# EAGLE board PCB (EAGLE 6.5.0)
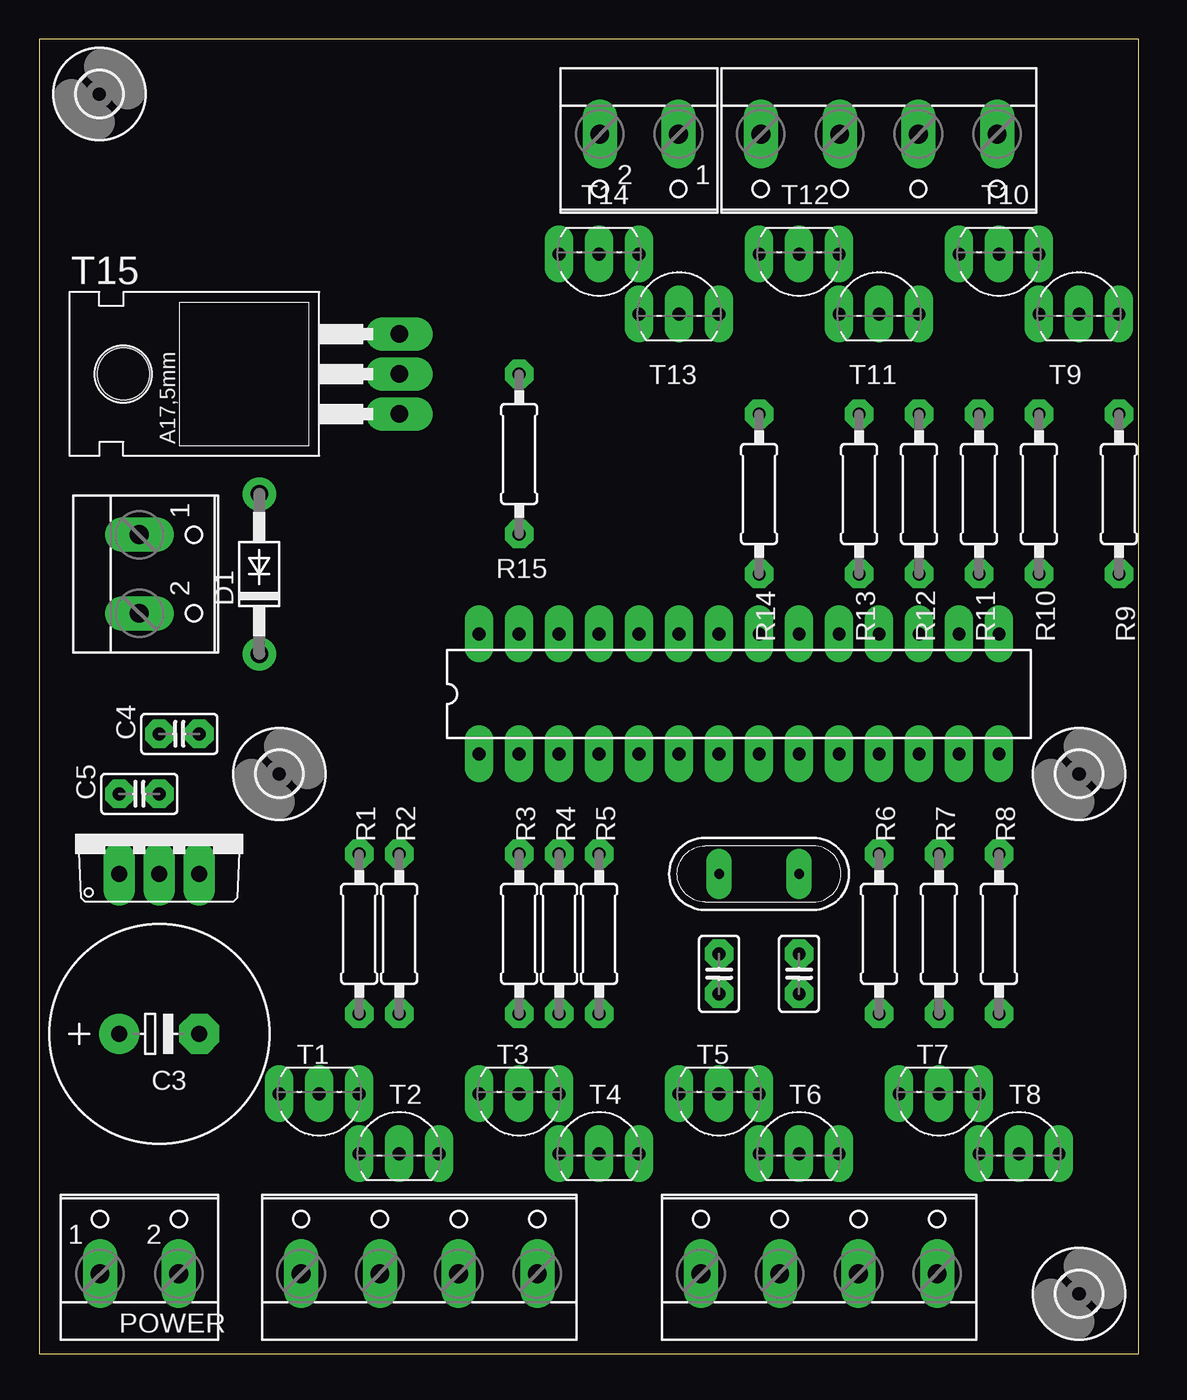
[diagram p0: board, top side]
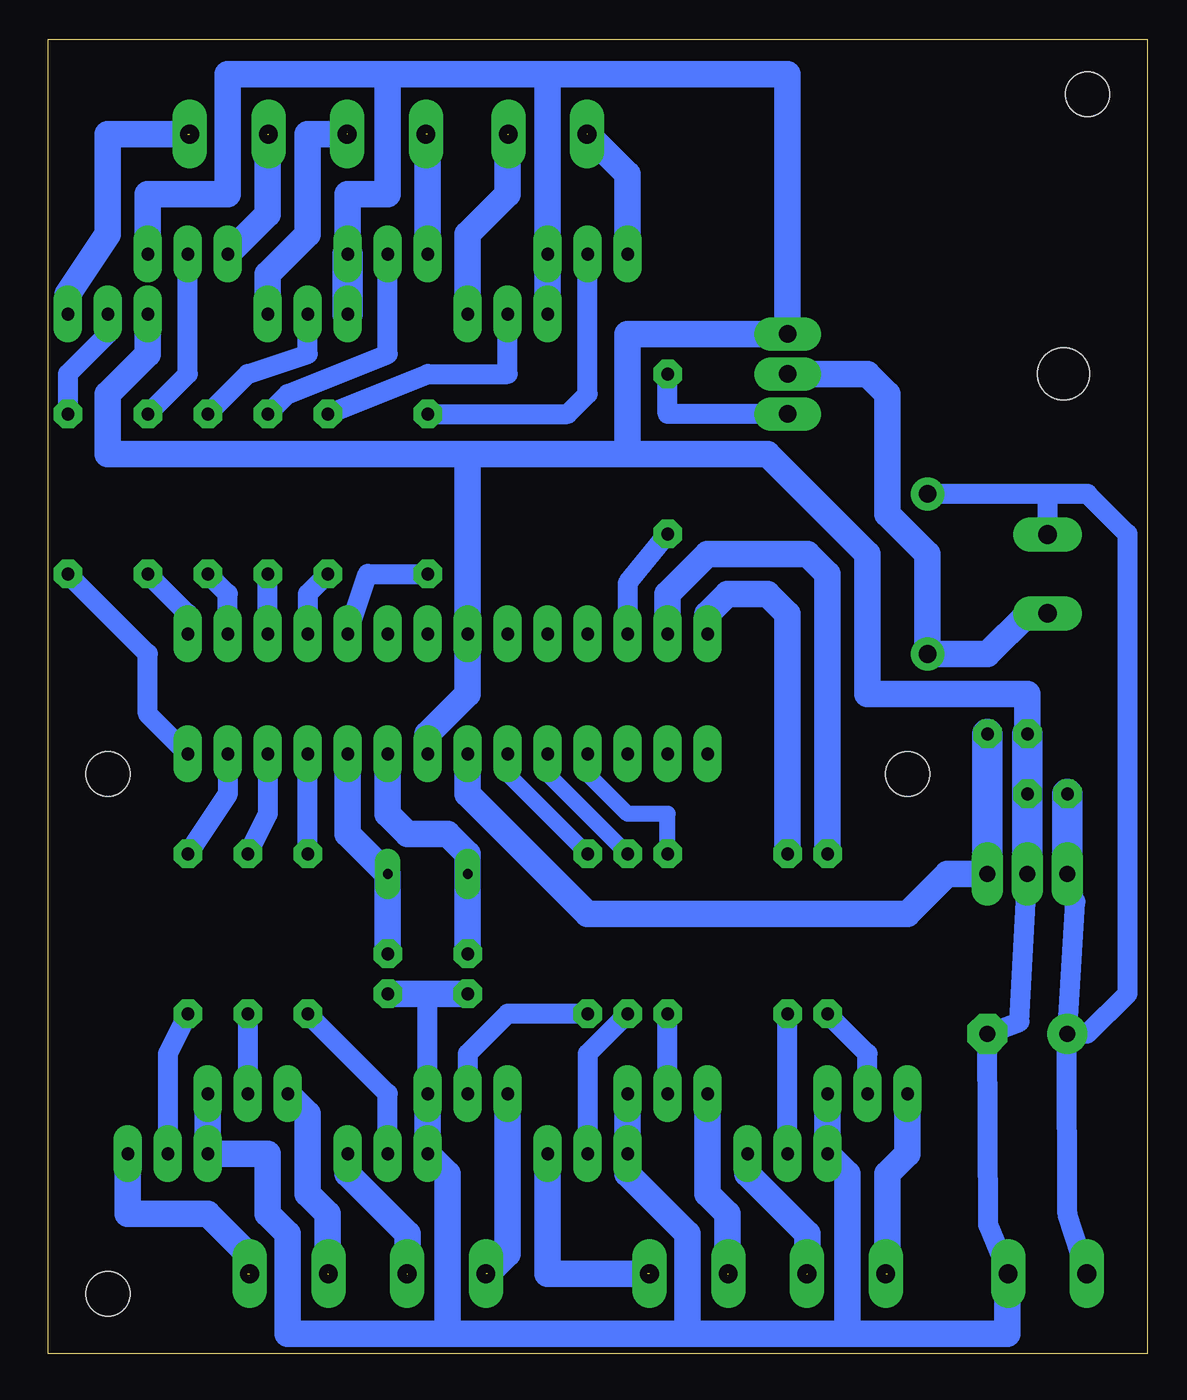
[diagram p1: board, bottom side, seen from below]

Size 69.84 x 83.49 mm. Coordinates in mm from the lower left corner, seen from the top.
Outline: 0,0 69.84,0 69.84,83.49 0,83.49 0,0
Copper layers (1*16): Top 0.8mm / dielectric 1.3mm / Bottom 0.8mm
Design rules "default": minimum track width 0.8mm, minimum drill 24mil, track to track 0.2mm, track to pad 0.2mm, pad to pad 0.2mm, via to via 0.2mm, smd to smd 0.2mm, copper to edge 0.3mm, drill to drill 0.3mm, minimum pad ring 0.5mm, minimum via ring 1mm, stop-mask expansion 4mil, vias tented up to drill 0mil, thermal gap 10mil

## Footprints (pad centres in the part's own frame; a part is rotated, then mirrored left to right if it is on the bottom)
C2.5-2 = drill 0.813 pad 1.6 octagon: 1 -1.27,0; 2 1.27,0
E5-13 = drill 1.016 pad 2.54: + -2.54,0 | drill 1.016 pad 2.54 octagon: - 2.54,0
DO41-10 = drill 1.118: A 5.08,0; C -5.08,0
2,8 = hole 2.8: 0,0
DIL28-3 = drill 0.813 long: 1 -16.51,-3.81; 2 -13.97,-3.81; 3 -11.43,-3.81; 4 -8.89,-3.81; 5 -6.35,-3.81; 6 -3.81,-3.81; 7 -1.27,-3.81; 8 1.27,-3.81; 9 3.81,-3.81; 10 6.35,-3.81; 11 8.89,-3.81; 12 11.43,-3.81; 13 13.97,-3.81; 14 16.51,-3.81; 15 16.51,3.81; 16 13.97,3.81; 17 11.43,3.81; 18 8.89,3.81; 19 6.35,3.81; 20 3.81,3.81; 21 1.27,3.81; 22 -1.27,3.81; 23 -3.81,3.81; 24 -6.35,3.81; 25 -8.89,3.81; 26 -11.43,3.81; 27 -13.97,3.81; 28 -16.51,3.81
TO220V = drill 1.016 long: 1 -2.54,-2.54; 2 0,-2.54; 3 2.54,-2.54
W237-102 = drill 1.194 long: 1 -2.5,-1.27; 2 2.5,-1.27
QS = drill 0.61 long: 1 -2.54,0; 2 2.54,0
0207/10 = drill 0.813 octagon: 1 -5.08,0; 2 5.08,0
TO92-EBC = drill 0.813 long: B 0,-1.27; C 2.54,-1.27; E -2.54,-1.27
TO220 = drill 1.118 long: 1 -2.54,-6.35; 2 0,-6.35; 3 2.54,-6.35 | hole 3.302: 0,11.176
W237-4 = drill 1.194 long: 1 -7.5,-1.27; 2 -2.5,-1.27; 3 2.5,-1.27; 4 7.5,-1.27

## Placement (x,y rotation side)
C1  22 nF  [C2.5-2]  43.18,24.13 270 top
C2  22 nF  [C2.5-2]  48.26,24.13 270 top
C3  [E5-13]  7.62,20.32 0 top
C4  [C2.5-2]  8.89,39.37 180 top
C5  [C2.5-2]  6.35,35.56 0 top
D1  1N4004  [DO41-10]  13.97,49.53 90 top
H1  MOUNT-HOLE2.8  [2,8]  3.81,80.01 0 top
H2  MOUNT-HOLE2.8  [2,8]  66.04,36.83 0 top
H3  MOUNT-HOLE2.8  [2,8]  66.04,3.81 0 top
H4  MOUNT-HOLE2.8  [2,8]  15.24,36.83 0 top
IC1  MEGA8-P  [DIL28-3]  44.45,41.91 0 top
IC2  7805TV  [TO220V]  7.62,33.02 0 top
POWER  12V  [W237-102]  6.35,6.35 0 top
Q1  16 MHz  [QS]  45.72,30.48 180 top
R1  1K  [0207/10]  20.32,26.67 90 top
R2  1K  [0207/10]  22.86,26.67 90 top
R3  1K  [0207/10]  30.48,26.67 90 top
R4  1K  [0207/10]  33.02,26.67 90 top
R5  1K  [0207/10]  35.56,26.67 90 top
R6  1K  [0207/10]  53.34,26.67 90 top
R7  1K  [0207/10]  57.15,26.67 90 top
R8  1K  [0207/10]  60.96,26.67 90 top
R9  1K  [0207/10]  68.58,54.61 270 top
R10  1K  [0207/10]  63.5,54.61 270 top
R11  1K  [0207/10]  59.69,54.61 270 top
R12  1K  [0207/10]  55.88,54.61 270 top
R13  1K  [0207/10]  52.07,54.61 270 top
R14  1K  [0207/10]  45.72,54.61 270 top
R15  1K  [0207/10]  30.48,57.15 270 top
T1  [TO92-EBC]  17.78,15.24 180 top
T2  [TO92-EBC]  22.86,13.97 0 top
T3  2N2222  [TO92-EBC]  30.48,15.24 180 top
T4  2N2222  [TO92-EBC]  35.56,13.97 0 top
T5  2N2222  [TO92-EBC]  43.18,15.24 180 top
T6  2N2222  [TO92-EBC]  48.26,13.97 0 top
T7  2N2222  [TO92-EBC]  57.15,15.24 180 top
T8  2N2222  [TO92-EBC]  62.23,13.97 0 top
T9  2N2222  [TO92-EBC]  66.04,67.31 0 top
T10  2N2222  [TO92-EBC]  60.96,68.58 180 top
T11  2N2222  [TO92-EBC]  53.34,67.31 0 top
T12  2N2222  [TO92-EBC]  48.26,68.58 180 top
T13  2N2222  [TO92-EBC]  40.64,67.31 0 top
T14  [TO92-EBC]  35.56,68.58 180 top
T15  TIP122  [TO220]  16.51,62.23 90 top
X1  LED's  [W237-4]  24.13,6.35 0 top
X2  LED's  [W237-4]  49.53,6.35 0 top
X3  LED's  [W237-4]  53.34,76.2 180 top
X4  LED's  [W237-102]  38.1,76.2 180 top
X5  STREETLIGHT & 12V+  [W237-102]  7.62,49.53 270 top

## Library data of the parts
C1 C2 C4 C5 = capacitor-wima
C3 = resistor
D1 = diode
H1-H4 = holes
IC1 = atmel; OC_FARNELL: unknown; OC_NEWARK: unknown
IC2 = linear
POWER X4 X5 = con-wago-500; MPN: 237-102; OC_FARNELL: unknown; OC_NEWARK: 70K9898
Q1 = special
R1-R15 = eagle-ltspice; SPICEMODEL: NONE; SPICEPREFIX: R
T1-T14 = transistor-neu-to92
T15 = transistor
X1-X3 = con-wago-500; OC_FARNELL: unknown; OC_NEWARK: unknown

## Nets
+5V: C4.1 IC1.7 IC2.3
+12V: C3.+ C5.1 D1.A IC2.1 POWER.1 X5.1
AVCC: IC1.20
GND: C1.2 C2.2 C3.- C4.2 C5.2 IC1.8 IC1.22 IC2.2 POWER.2 T1.E T2.E T3.E T4.E T5.E T6.E T7.E T8.E T9.E T10.E T11.E T12.E T13.E T14.E T15.3
N$1: R9.1 T9.B
N$2: R10.1 T10.B
N$3: R11.1 T11.B
N$4: R12.1 T12.B
N$5: R13.1 T13.B
N$6: R14.1 T14.B
N$7: R6.1 T6.B
N$8: R5.1 T5.B
N$9: R7.1 T7.B
N$10: R8.1 T8.B
N$11: R4.1 T4.B
N$12: R3.1 T3.B
N$13: R2.1 T2.B
N$14: R1.1 T1.B
N$15: T7.C X2.3
N$17: T3.C X1.3
N$21: T5.C X2.1
N$22: T8.C X2.4
N$23: T9.C X3.1
N$24: T10.C X3.2
N$25: T11.C X3.3
N$26: T12.C X3.4
N$27: T13.C X4.1
N$28: T14.C X4.2
N$29: IC1.19 R14.2
N$30: IC1.18 R13.2
N$31: IC1.17 R12.2
N$32: IC1.16 R11.2
N$33: IC1.15 R10.2
N$34: IC1.14 R9.2
N$35: IC1.27 R1.2
N$36: IC1.28 R2.2
N$37: IC1.4 R3.2
N$38: IC1.5 R4.2
N$39: IC1.6 R5.2
N$40: IC1.11 R6.2
N$41: IC1.12 R7.2
N$42: IC1.13 R8.2
N$43: R15.1 T15.1
N$44: C1.1 IC1.9 Q1.2
N$45: C2.1 IC1.10 Q1.1
N$46: T6.C X2.2
N$47: T4.C X1.4
N$48: D1.C T15.2 X5.2
N$49: T1.C X1.1
N$50: T2.C X1.2
N$53: IC1.26 R15.2

## Tracks (layer width: path | path; a pad name or v marks a point on that pad's centre or on a via)
+5V
  Bottom 1.676: IC1.7 43.18,35.56 35.56,27.94 15.24,27.94 12.7,30.48 IC2.3
  Bottom 1.93: IC2.3 C4.1
+12V
  Bottom 1: 3.85,20.32 5.12,19.6 C3.+
  Bottom 1.27: POWER.1 5.08,8.89 5.12,19.6 | C3.+ 4.57,28.7 IC2.1 | 6.35,54.61 3.81,54.61 1.27,52.07 1.27,22.86 3.85,20.32 | 6.35,54.61 D1.A | 6.35,54.61 X5.1
  Bottom 1.93: IC2.1 C5.1
GND
  Bottom 1: 8.89,5.08 POWER.2
  Bottom 1.27: IC2.2 8.13,21.08 C3.- 10.12,8.17 POWER.2 | T5.E 45.72,22.86
  Bottom 1.676: 44.45,1.27 29.21,1.27 | 29.21,1.27 19.05,1.27 | 19.05,1.27 8.89,1.27 8.89,5.08 | 44.45,1.27 54.61,1.27 54.61,7.62 55.88,8.89 55.88,12.7 T8.E T7.E | C1.2 45.72,22.86 C2.2 | IC1.8 45.72,39.37 43.18,41.91 IC1.22 43.18,57.15 | 33.02,57.15 33.02,64.77 T15.3 22.86,81.28 38.1,81.28 | C4.2 7.62,41.91 17.78,41.91 17.78,50.8 24.13,57.15 33.02,57.15 | 43.18,57.15 33.02,57.15 | 38.1,81.28 T14.E T13.E | T12.E 50.8,73.66 48.26,73.66 48.26,81.28 | 48.26,81.28 38.1,81.28 | T10.E 63.5,73.66 58.42,73.66 58.42,81.28 48.26,81.28 | 43.18,57.15 66.04,57.15 66.04,60.96 63.5,63.5 T9.E | T1.E T2.E 19.05,11.43 19.05,1.27 | T3.E T4.E 33.02,11.43 29.21,7.62 29.21,1.27 | T5.E T6.E 44.45,11.43 44.45,1.27
  Bottom 1.93: C4.2 C5.2 IC2.2 | T11.E T12.E
N$1
  Bottom 1.27: T9.B 66.04,64.77 68.58,62.23 R9.1
N$2
  Bottom 1.27: R10.1 60.96,62.23 T10.B
N$3
  Bottom 1.27: R11.1 57.15,62.23 53.34,63.5 T11.B
N$4
  Bottom 1.27: R12.1 54.61,60.96 48.26,63.5 T12.B
N$5
  Bottom 1.27: R13.1 45.72,62.23 40.64,62.23 T13.B
N$6
  Bottom 1.27: R14.1 36.83,59.69 35.56,60.96 T14.B
N$7
  Bottom 1.27: T6.B 48.26,16.51 R6.1
N$8
  Bottom 1.27: R5.1 40.64,21.59 43.18,19.05 T5.B
N$9
  Bottom 1.27: R7.1 T7.B
N$10
  Bottom 1.27: R8.1 62.23,19.05 T8.B
N$11
  Bottom 1.27: R4.1 35.56,19.05 T4.B
N$12
  Bottom 1.27: T3.B R3.1
N$13
  Bottom 1.27: T2.B R2.1
N$14
  Bottom 1.27: T1.B 17.78,19.05 R1.1
N$15  (1 unrouted)
  Bottom 1.676: 52.07,5.08 52.07,8.89 53.34,10.16 53.34,15.24 T7.C
N$17  (1 unrouted)
  Bottom 1.676: 26.67,5.08 26.67,8.89 27.94,10.16 T3.C
N$21  (1 unrouted)
  Bottom 1.676: 41.91,5.08 40.64,6.35 T5.C
N$22  (1 unrouted)
  Bottom 1.676: 57.15,5.08 57.15,6.35 59.69,8.89 64.77,8.89 T8.C
N$23  (1 unrouted)
  Bottom 1.676: T9.C 68.58,67.31 66.04,71.12 66.04,77.47 60.96,77.47
N$24  (1 unrouted)
  Bottom 1.676: T10.C 55.88,72.39 55.88,76.2
  Bottom 1.93: 55.88,76.2 55.88,77.47
N$25  (1 unrouted)
  Bottom 1.676: T11.C 55.88,68.58 53.34,71.12 53.34,77.47 50.8,77.47
N$26  (1 unrouted)
  Bottom 1.676: T12.C 45.72,77.47
N$27  (1 unrouted)
  Bottom 1.676: T13.C 43.18,71.12 40.64,73.66 40.64,77.47
N$28  (1 unrouted)
  Bottom 1.676: T14.C 33.02,74.93 35.56,77.47
N$29
  Bottom 1.27: IC1.19 49.53,49.53 R14.2
N$30
  Bottom 1.27: R13.2 53.34,48.26 53.34,46.99 IC1.18
N$31
  Bottom 1.27: IC1.17 R12.2
N$32
  Bottom 1.27: IC1.16 58.42,48.26 R11.2
N$33
  Bottom 1.27: IC1.15 60.96,46.99 R10.2
N$34
  Bottom 1.27: R9.2 63.5,44.45 63.5,40.64 IC1.14
N$35
  Bottom 1.676: IC1.27 30.48,48.26 27.94,50.8 21.59,50.8 20.32,49.53 R1.2
N$36
  Bottom 1.676: R2.2 22.86,46.99 24.13,48.26 26.67,48.26 27.94,46.99 IC1.28
N$37
  Bottom 1.016: IC1.4 35.56,36.83 33.02,34.29 30.48,34.29 R3.2
N$38
  Bottom 1.016: IC1.5 38.1,36.83 R4.2
N$39
  Bottom 1.016: R5.2 40.64,36.83 IC1.6
N$40
  Bottom 1.27: R6.2 IC1.11
N$41
  Bottom 1.27: IC1.12 55.88,34.29 R7.2
N$42
  Bottom 1.27: IC1.13 58.42,35.56 R8.2
N$43
  Bottom 1.27: T15.1 30.48,59.69 R15.1
N$44
  Bottom 1.676: C1.1 Q1.2 43.18,31.75 44.45,33.02 46.99,33.02 48.26,34.29 IC1.9
N$45
  Bottom 1.676: C2.1 Q1.1 50.8,33.02 IC1.10
N$46  (1 unrouted)
  Bottom 1.676: 46.99,5.08 46.99,7.62 50.8,11.43 T6.C
N$47  (1 unrouted)
  Bottom 1.676: 31.75,5.08 38.1,5.08 T4.C
N$48
  Bottom 1.676: X5.2 7.58,47.03 10.16,44.45 D1.C 13.97,50.8 16.51,53.34 16.51,60.96 17.78,62.23 T15.2
N$49  (1 unrouted)
  Bottom 1.676: 16.51,5.08 16.51,11.43 15.24,12.7 T1.C | X1.1 16.63,6.23
N$50  (1 unrouted)
  Bottom 1.676: 21.59,5.08 21.59,7.62 25.4,11.43 T2.C
N$53
  Bottom 1.27: R15.2 33.02,48.94 IC1.26